# Altium PCB OpenPack_BATMOD_V1p0.PcbDoc (part 2 of 2)
Units mil, origin at the board's own origin, x right, y up, seen from the top; angles counter-clockwise.
Board outline 5511.81 x 3700.79 mil, 4 copper layers (Top Layer, Mid Layer 1, Mid Layer 2, Bottom Layer), stack 61.811 mil thick; 232 components, 137 nets, 760 pads, 470 vias.
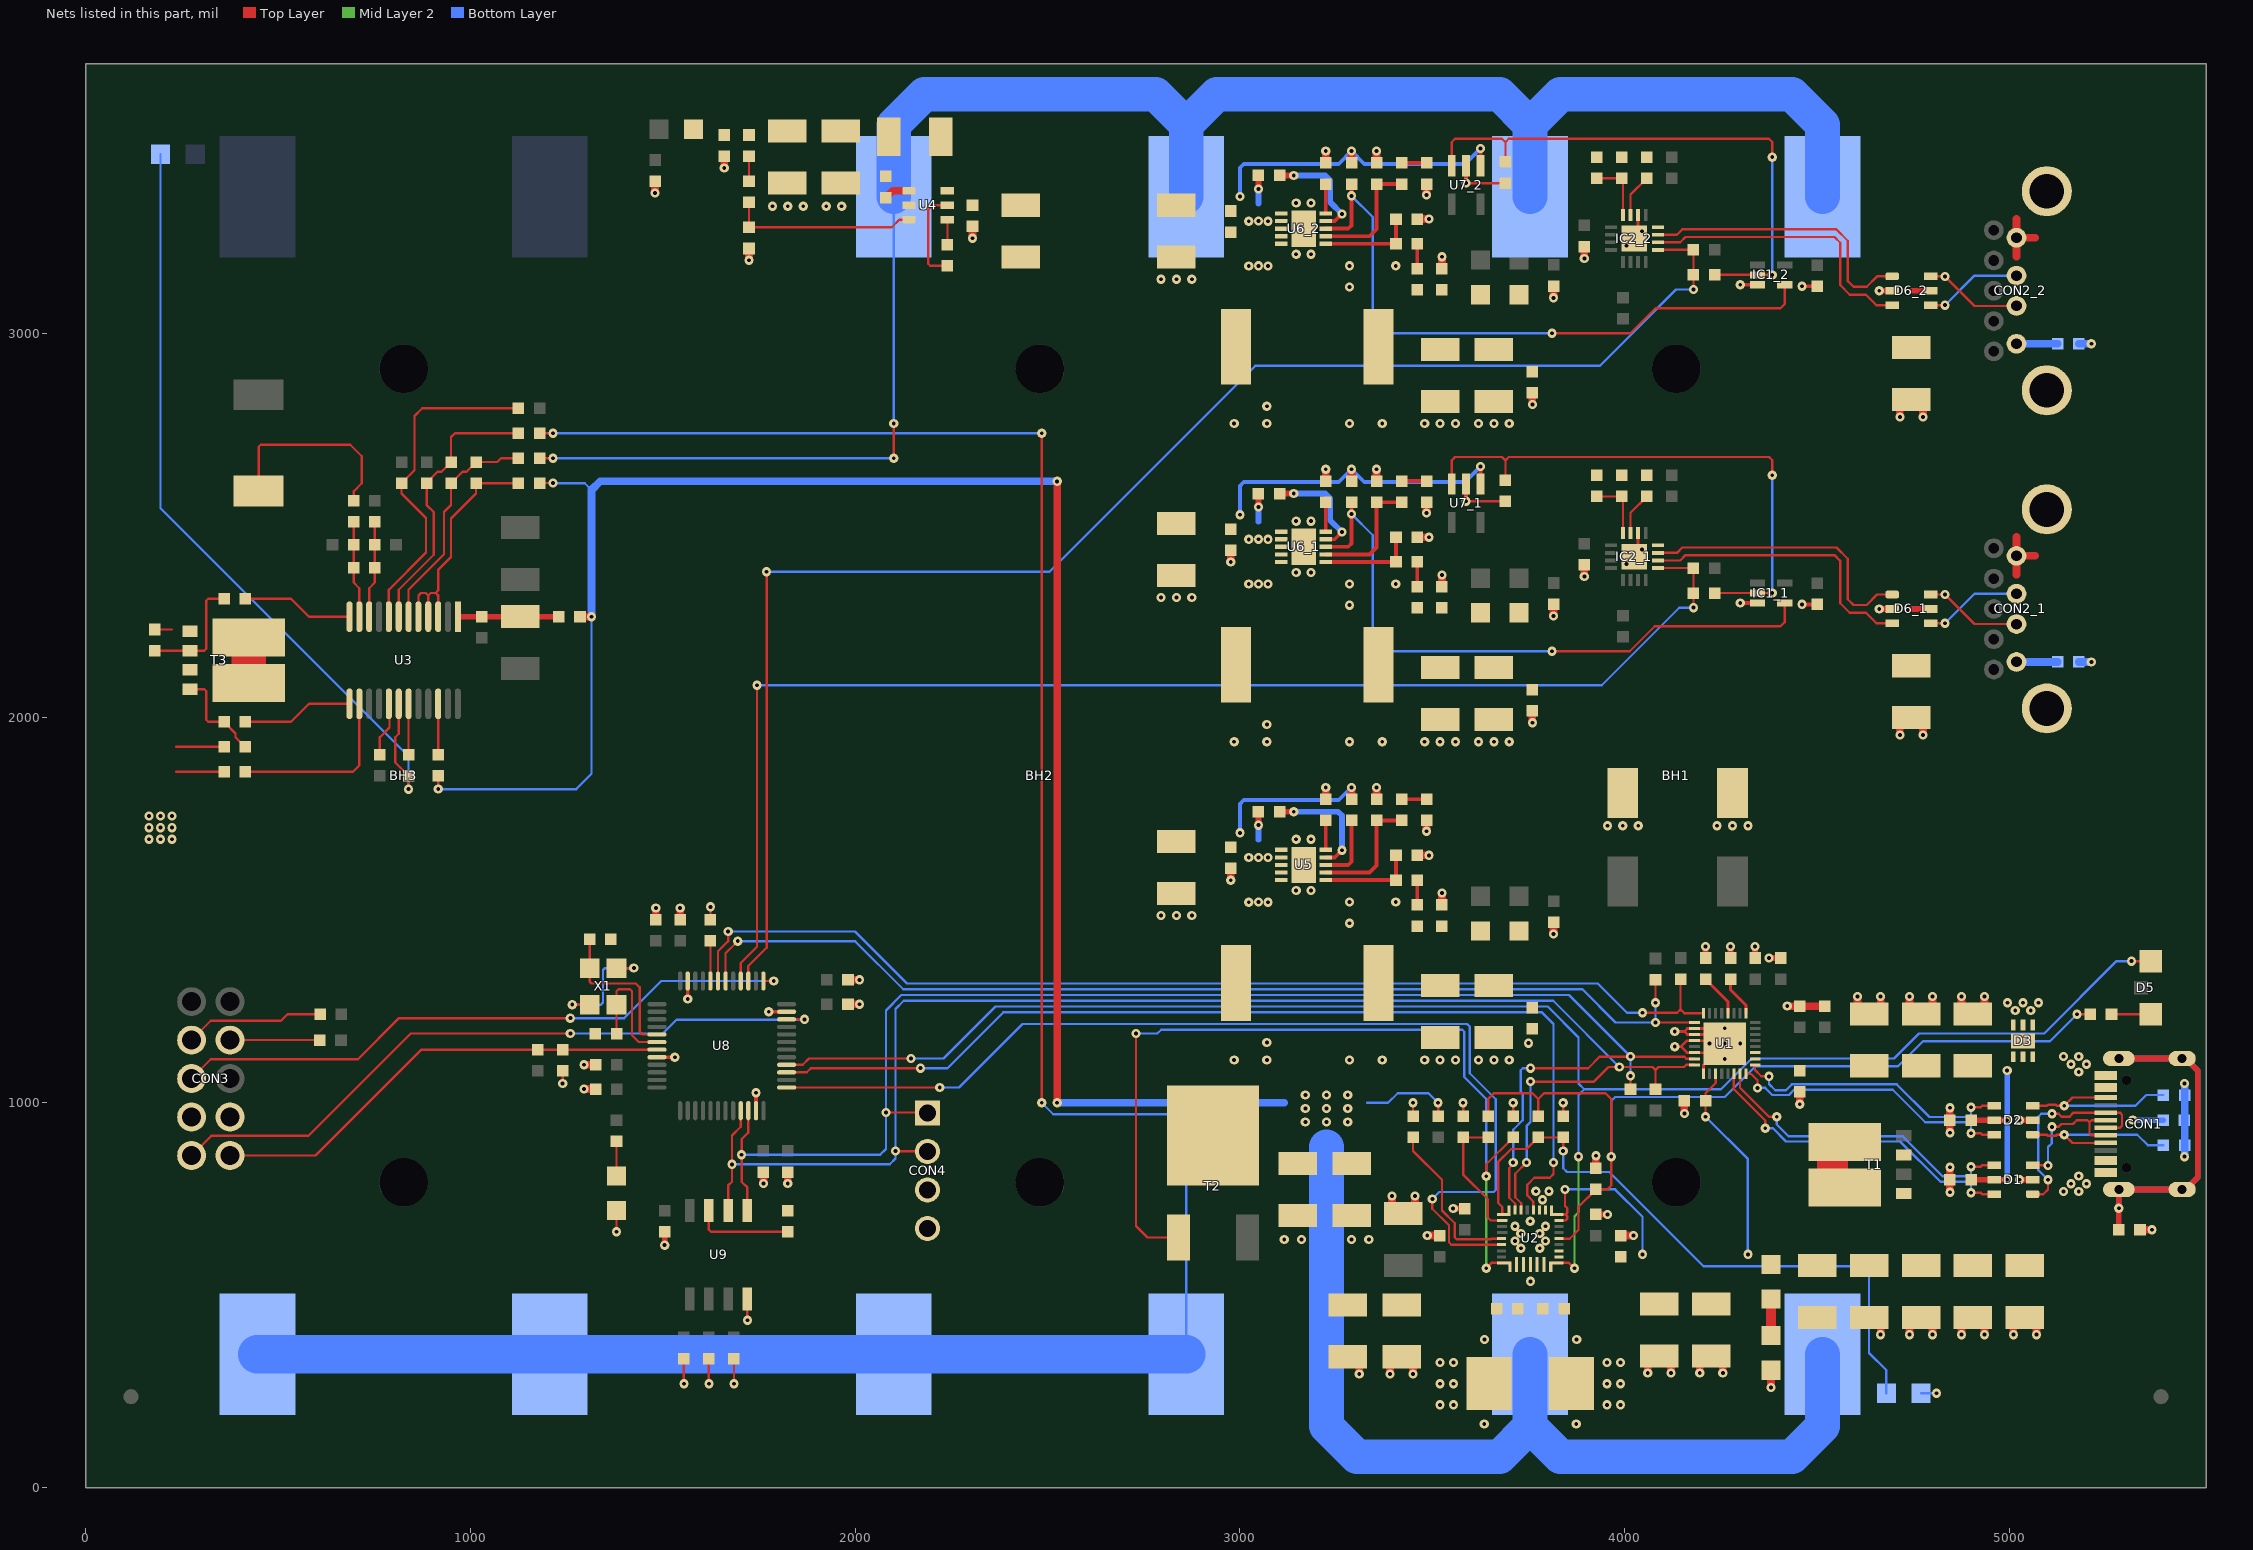
[diagram p4: the nets of this part, all layers, seen from the top]

## Via types
v1: diameter 24, hole 10, Top Layer to Bottom Layer, tented both sides, 470 vias

## Nets (pads, with @x,y where several pads share a name; then routed paths per layer and width w, separated by ;. In a path a pad name is that pad's centre, name@x,y a point inside that pad or via, vN(x,y) a via of type N, cw(c..) or ccw(c..) an arc to the next point about the centre after c; other vN are vias at no path point) (continued)
GND: C1.1 C2.1 C3.1 C4.1 C5.1 C6.1 C7.1 C8.1 C9.1 C10.1 C11.1 C12.1 C13.1 C14.1 C15.1 C16.1 C17.1 C18.1 C19.1 C20.1 C21.1 C22.1 C23.1 C24.1 C25_1.2 C25_2.2 C26.1 C28.1 C29.1 C30.1 C31.1 C33.1 C34.1 C35.1 C47.1 C48.2 C49.1 C50.1 C51.2 C52.2 C54.1 C55.2 C56.1 C57.1 C58.2 C59.2 C60.2 C61.2 C63_1.1 C63_2.1 C64_1.2 C64_2.2 C65_1.1 C65_2.1 C66_1.1 C66_2.1 C67_1.2 C67_2.2 C68_1.2 C68_2.2 C69_1.2 C69_2.2 C70_1.2 C70_2.2 C71_1.2 C71_2.2 C72_1.1 C72_2.1 C73_1.2 C73_2.2 C74.1 C75.1 C76.1 C77.1 C78.1 C79.1 C80.1 C81.1 C82.1 C83.1 C84.1 C85.1 C86.2 C87.1 C88_1.1 C88_2.1 C89.1 C90.2 C91.2 C92.1 CON1.A1/B12 CON1.A12/B1 CON2_1.4 CON2_1.Shell CON2_2.4 CON2_2.Shell CON3.3 CON3.4 CON4.3 CON4.4 D1.2 D2.2 D3.1 D3.2 D3.3 D3.7 D4.2 D6_1.2 D6_2.2 IC1_1.3 IC1_2.3 IC2_1.14 IC2_1.17 IC2_2.14 IC2_2.17 R1.2 R7.2 R10.2 R11.2 R24.1 R25.1 R30.1 R33.1 R35.1 R39_1.1 R39_2.1 R41_1.1 R41_2.1 R43_1.1 R43_2.1 R44_1.1 R44_2.1 R45_1.1 R45_2.1 R46_1.1 R46_2.1 R52.2 R59.1 R60.1 R61.1 R62.1 RT1.1 T3.3 U1.10 U1.11 U1.12 U1.14 U1.17 U1.33 U2.10 U2.11 U2.27 U4.2 U5.3 U5.4 U5.5 U5.EXP U6_1.3 U6_1.4 U6_1.5 U6_1.EXP U6_2.3 U6_2.4 U6_2.5 U6_2.EXP U7_1.2 U7_2.2 U8.8 U8.23 U8.35 U8.47 U9.4 | length 5376.2
  Top Layer w6: 235,1860 R25.1@360,1860 ; 235,1925 R24.1@360,1925 ; v1(1240,1050) C82.1@1240,1083.16 ; v1(1379.94,665) D4.2@1379.94,720 ; v1(1555,270) R60.1@1555,335 ; v1(1620,270) R61.1@1620,335 ; R52.2@1624.02,1476 v1(1624.02,1509.16) ; v1(1685,270) R62.1@1685,335 ; v1(1720,435) U9.4@1720,490 ; R7.2@3450,965 v1(3450,1000) ; R10.2@3580,965 v1(3580,1000) ; v1(3587.61,2563.23) 3687.5,2563.23 R43_1.1@3690,2560.73 ; v1(3587.61,3390) 3687.5,3390 R43_2.1@3690,3387.5 ; C33.1@3710,965 v1(3710,1000) ; R11.2@3840,965 v1(3840,1000) ; IC2_1.17@4034.84,2448.52 v1(4045.16,2438.2) ; IC2_2.17@4034.84,3275.29 v1(4045.16,3264.98)
  Top Layer w7: v1(4130,1185.24) 4154.76,1185.24 ; v1@4132.43,1148.3 v1(4130,1145.87) 4145.87,1145.87 ; U1.17@4204.88,1075 4204.88,1098.62 U1.33@4236.38,1130.12 ; U1.33@4252.13,1130.12 U1.33@4236.38,1130.12 ; U1.33@4252.13,1177.36 U1.11@4181.26,1177.36 4162.64,1177.36 4154.76,1185.24 ; U1.33@4252.13,1193.11 U1.10@4181.26,1193.11 4162.64,1193.11 4154.76,1185.24 ; 4145.87,1145.87 4161.61,1161.61 U1.12@4181.26,1161.61 4252.13,1161.61 v1(4260,1153.74) U1.33@4236.38,1130.12 ; 4145.87,1145.87 4161.61,1130.12 U1.14@4181.26,1130.12 U1.33@4236.38,1130.12
  Top Layer w8: IC2_1.17@4034.84,2448.52 IC2_1.14@4034.84,2480.25 ; IC2_2.17@4034.84,3275.29 IC2_2.14@4034.84,3307.02
  Top Layer w10: U8.8@1485.08,1118.47 v1(1531.5,1118.47) ; v1(1564.96,1270.04) U8.47@1564.96,1316.46 ; U8.23@1742.13,979.54 v1(1742.13,1025.96) ; v1(1775.58,1236.58) U8.35@1822.01,1236.58 ; v1(3587.61,2563.23) U7_1.2@3587.61,2608.23 ; v1(3587.61,3390) U7_2.2@3587.61,3435 ; v1(4300,2299.13) IC1_1.3@4345,2299.13 ; v1(4300,3125.91) IC1_2.3@4345,3125.91 ; v1(4460.87,2295.32) C71_1.2@4500,2295.32 ; v1(4460.87,3122.09) C71_2.2@4500,3122.09
  Top Layer w15: v1(1505,630) C89.1@1505,665 ; C13.1@4210,1376.24 v1(4210,1406.24) ; C14.1@4275,1376.24 v1(4275,1406.24) ; C18.1@4338.74,1376.24 v1(4338.74,1406.24) ; v1(4375,1376.24) C17.1@4405,1376.24 ; v1(4661.54,2283.46) D6_1.2@4695,2283.46 ; v1(4661.54,3110.24) D6_2.2@4695,3110.24 ; v1(5026.21,799.95) D1.2@5060,799.95 ; v1(5026.21,954.52) D2.2@5060,954.52
  Top Layer w20: v1(1295.54,1035.6) C81.1@1325.54,1035.6 ; v1(1295.54,1098.79) C80.1@1325.54,1098.79 ; v1(1480,3364.34) C52.2@1480,3395 ; C79.1@1482.09,1476 v1(1482.09,1506) ; C78.1@1545.28,1476 v1(1545.28,1506) ; v1(1660,3429.34) C51.2@1660,3460 ; v1(1724.23,3189.34) R30.1@1724.23,3220 ; v1(1761.81,790) C74.1@1761.81,820 ; v1(1825,790) C75.1@1825,820 ; C76.1@1981.54,1256.27 v1(2011.54,1256.27) ; C77.1@1981.54,1319.46 v1(2011.54,1319.46) ; v1(2305,3246.84) C48.2@2305,3277.5 ; C64_2.2@2975.5,3262 C64_2.2@2976,3262.5 ; v1(2976,1578.3) C55.2@2976,1608.96 ; v1(2976,2405.07) C64_1.2@2976,2435.73 ; R33.1@3223.16,1788.96 v1(3223.16,1819.61) ; R39_1.1@3223.16,2615.73 v1(3223.16,2646.39) ; R39_2.1@3223.16,3442.5 v1(3223.16,3473.16) ; v1(3310,295) C24.1@3310,327.5 ; C61.2@3355,1788.96 v1(3355,1819.61) ; C70_1.2@3355,2615.73 v1(3355,2646.39) ; C70_2.2@3355,3442.5 v1(3355,3473.16) ; v1(3390,295) C23.1@3390,327.5 ; C92.1@3395,725 v1(3395,757.5) ; v1(3450,295) C23.1@3450,327.5 ; C92.1@3455,725 v1(3455,757.5) ; R35.1@3460.64,1643.08 v1(3491.29,1643.08) ; R41_1.1@3460.64,2469.85 v1(3491.29,2469.85) ; R41_2.1@3460.64,3296.62 v1(3491.29,3296.62) ; v1(3485,1705.8) C60.2@3485,1733.96 C60.2@3485,1736.46 ; v1(3485,2532.57) C69_1.2@3485,2560.73 C69_1.2@3485,2563.23 ; v1(3485,3359.34) C69_2.2@3485,3387.5 C69_2.2@3485,3390 ; v1(3486.63,655) C87.1@3519.13,655 ; C86.2@3525,1514.35 v1(3525,1545.01) ; C25_1.2@3525,2341.12 v1(3525,2371.78) ; C25_2.2@3525,3167.9 v1(3525,3198.55) ; v1(3760,1987.57) C67_1.2@3760,2018.23 ; v1(3760,2814.34) C67_2.2@3760,2845 ; v1(3815,1438.3) C59.2@3815,1468.96 ; v1(3815,2265.07) C68_1.2@3815,2295.73 ; v1(3815,3091.84) C68_2.2@3815,3122.5 ; v1(3895,2367.57) C88_1.1@3895,2398.23 ; v1(3895,3194.34) C88_2.1@3895,3225 ; C31.1@3925,830 v1(3925,862.5) ; C19.1@3990,655 v1(4022.5,655) ; v1(4060,297.5) C29.1@4060,330 ; v1(4120,297.5) C29.1@4120,330 ; v1(4155,972.5) C9.1@4155,1005 ; v1(4195,297.5) C30.1@4195,330 ; v1(4255,297.5) C30.1@4255,330 ; v1(4380,260) C26.1@4380,305 ; v1(4422.5,1251.24) C15.1@4455,1251.24 C16.1@4520,1251.24 ; v1(4455,996.24) C5.1@4455,1028.74 ; C6.1@4605,1243.74 v1(4605,1276.24) ; v1(4665,397.5) C20.1@4665,430 ; C6.1@4665,1243.74 v1(4665,1276.24) ; v1(4715,1955.73) C72_1.1@4715,1988.23 ; v1(4715,2782.5) C72_2.1@4715,2815 ; v1(4740,397.5) C10.1@4740,430 ; C7.1@4740,1243.74 v1(4740,1276.24) ; v1(4775,1955.73) C72_1.1@4775,1988.23 ; v1(4775,2782.5) C72_2.1@4775,2815 ; v1(4800,397.5) C10.1@4800,430 ; C7.1@4800,1243.74 v1(4800,1276.24) ; v1(4845,767.45) C2.1@4845,799.95 v1(4845,832.45) ; v1(4845,922.02) C1.1@4845,954.52 v1(4845,987.02) ; v1(4875,397.5) C11.1@4875,430 ; C8.1@4875,1243.74 v1(4875,1276.24) ; v1(4935,397.5) C11.1@4935,430 ; C8.1@4935,1243.74 v1(4935,1276.24) ; v1(5010,397.5) C12.1@5010,430 ; 5018.11,2372.4 CON2_1.4@5018.11,2421.26 ; 5018.11,2470.12 CON2_1.4@5018.11,2421.26 ; 5018.11,3199.17 CON2_2.4@5018.11,3248.03 ; 5018.11,3296.89 CON2_2.4@5018.11,3248.03 ; 5066.97,2421.26 CON2_1.4@5018.11,2421.26 ; 5066.97,3248.03 CON2_2.4@5018.11,3248.03 ; v1(5070,397.5) C12.1@5070,430 ; R1.2@5339.06,670 v1(5370,670)
  Bottom Layer w6: RT1.1@4770,245 v1(4810,245)
  Bottom Layer w20: C73_1.2@5180,2145.67 v1(5212.56,2145.67) ; C73_2.2@5180,2972.44 v1(5212.56,2972.44) ; v1(5455,860) C4.1@5455,890 C3.1@5455,1020 v1(5455,1050)
  other v1: 3635,165 3874.13,165 3635.87,385 3875,385 3755,536 3115,645 3160,645 3290,645 3335,645 3754.57,692 3786.06,748 3769,770 3803.13,770 5140,769.76 5180,769.76 5160,789.76 5200,789.76 5180,809.76 5180,1080 5160,1100 5200,1100 2985,1111.46 3070,1111.46 3285,1111.46 3370,1111.46 3480,1111.46 3520,1111.46 3560,1111.46 3620,1111.46 3660,1111.46 3700,1111.46 4260,1113.74 5140,1120 5180,1120 4220,1153.74 4300,1153.74 3750,1155 3070,1156.46 4260,1193.74 5015,1240 5055,1240 4995,1260 5035,1260 5075,1260 3285,1466.46 2795,1486.46 2835,1486.46 2875,1486.46 3285,1521.46 3405,1521.46 3146.16,1551.46 3185,1551.46 165,1685 195,1685 225,1685 3146.16,1684.72 3185,1684.72 165,1715 195,1715 225,1715 3955,1720 3995,1720 4035,1720 4240,1720 4280,1720 4320,1720 165,1745 195,1745 225,1745 2985,1938.23 3070,1938.23 3285,1938.23 3370,1938.23 3480,1938.23 3520,1938.23 3560,1938.23 3620,1938.23 3660,1938.23 3700,1938.23 3070,1983.23 3285,2293.23 2795,2313.23 2835,2313.23 2875,2313.23 3285,2348.23 3405,2348.23 3146.16,2378.23 3185,2378.23 4004.84,2400.25 3146.16,2511.49 3185,2511.49 2985,2765 3070,2765 3285,2765 3370,2765 3480,2765 3520,2765 3560,2765 3620,2765 3660,2765 3700,2765 3070,2810 3285,3120 2795,3140 2835,3140 2875,3140 3285,3175 3405,3175 3146.16,3205 3185,3205 4004.84,3227.02 1785,3330 1825,3330 1865,3330 1925,3330 1965,3330 3146.16,3338.26 3185,3338.26
H\C\_1: IC1_1.4 R36_1.1 U6_1.8 | length 1695.1
  Top Layer w6: v1(3810.77,2173.23) 4013.23,2173.23 4078.23,2238.23 4405,2238.23 4415.87,2249.09 IC1_1.4@4415.87,2299.13
  Top Layer w10: U6_1.8@3223.16,2444.86 3281.63,2444.86 3290,2453.23 v1(3290,2530.07) R36_1.1@3290,2560.73
  Bottom Layer w6: v1(3290,2530.07) 3345,2475.07 3345,2198.23 3370,2173.23 v1(3810.77,2173.23)
H\C\_2: IC1_2.4 R36_2.1 U6_2.8 | length 1695.1
  Top Layer w6: v1(3810.77,3000) 4015,3000 4080,3065 4405,3065 4415.87,3075.87 IC1_2.4@4415.87,3125.91
  Top Layer w10: U6_2.8@3223.16,3271.63 3281.63,3271.63 3290,3280 v1(3290,3356.84) R36_2.1@3290,3387.5
  Bottom Layer w6: v1(3290,3356.84) 3345,3301.84 3345,3025 3370,3000 v1(3810.77,3000)
I2C_C_SCL: CON4.2 R2.1 U1.16 U2.14 U8.21 U9.6 | length 3994.9
  Top Layer w6: U9.6@1670,720 1670,785 1680,795 v1(1680,840) 1680,915 1702.76,937.76 U8.21@1702.76,979.54 ; v1(2105,875) 2105.73,874.27 2187.43,874.27 CON4.2@2188.16,873.54 ; U2.14@3730.94,721.73 3730.94,739.06 3715.5,754.5 3715.5,815.5 v1(3745,845) ; v1(3755,1055) 3920,1055 3957.99,1092.99 v1(3985.99,1092.99) 4072.01,1092.99 4080,1085 ; R2.1@4080,1035 4080,1085 ; U1.16@4181.26,1098.62 4159.68,1098.62 4154.05,1092.99 4087.99,1092.99 4080,1085
  Bottom Layer w6: v1(1680,840) 2090,840 2105,855 2105,1243.79 2126.21,1265 3813.98,1265 v1(3985.99,1092.99) ; v1(3745,845) 3745,940 3755,950 v1(3755,1055)
I2C_C_SDA: CON4.1 R3.1 U1.15 U2.15 U8.22 U9.5 | length 4085.7
  Top Layer w6: U9.5@1720,720 1720,780 1705,795 v1(1705,865) 1705,905 1722.44,922.44 U8.22@1722.44,979.54 ; v1(2080,975) 2186.7,975 CON4.1@2188.16,973.54 ; v1(3710,845) 3710,840.88 3699.76,830.64 3699.76,753.24 3715.2,737.8 U2.15@3715.2,721.73 ; v1(3755,1090) 3905,1090 3935,1120 v1(4015,1120) 4154.05,1120 4159.68,1114.37 U1.15@4181.26,1114.37 ; R3.1@4015,1035 v1(4015,1070)
  Bottom Layer w6: v1@1699.35,865 2065,865 2080,880 2080,1240 2120,1280 3855,1280 v1(4015,1120) v1(4015,1070) ; v1(3710,845) 3710,930 3735,955 3735,1024.86 3730,1029.86 3730,1084.73 3735.27,1090 v1(3755,1090)
I2C_T_SCL: R4.1 U1.9 U8.42 | length 2802
  Top Layer w6: U8.42@1663.39,1316.46 1663.39,1388.39 v1(1695,1420) ; v1@4078.78,1209.92 v1@4079.92,1208.78 ; v1(4080,1208.86) U1.9@4181.26,1208.86 ; v1(4080,1260) R4.1@4080,1320
  Bottom Layer w6: v1(1695,1420) 2000,1420 2125,1295 2248,1295 3890,1295 3976.14,1208.86 v1(4080,1208.86) ; v1@4080,1210 v1(4080,1260)
I2C_T_SDA: R5.1 U1.8 U8.43 | length 2848.1
  Top Layer w6: U8.43@1643.7,1316.46 1643.7,1393.7 1670,1420 v1(1670,1445) ; v1(4046,1234) 4136.52,1234 4145,1242.48 ; R5.1@4145,1321.24 4145,1242.48 ; U1.8@4204.88,1232.48 4155,1232.48 4145,1242.48
  Bottom Layer w6: v1(1670,1445) 2000,1445 2135,1310 2248,1310 3930,1310 4006,1234 v1(4046,1234)
I\N\T\: U2.21 U8.25 | length 2743.6
  Top Layer w6: U8.25@1822.01,1039.73 v1(2219.73,1039.73) ; v1(3500,750) 3500,724.73 3543.13,681.59 3543.13,637.32 3549.27,631.18 U2.21@3679.76,631.18
  Bottom Layer w6: v1(2219.73,1039.73) 2269.73,1039.73 2435,1205 2470,1205 3590,1205 3597,1198 3597,1077 3665,1009 3665,773.27 3659.73,768 3518,768 v1(3500,750)
ILIM_HIZ: R8.2 R10.1 U2.17 | length 340.5
  Top Layer w6: R8.2@3645,910 R10.1@3580,910 3580,814 3644,750 3644,702 3651.83,694.17 U2.17@3681.73,694.17
LC_1: IC1_1.2 R42_1.1 R43_1.2 U7_1.3 | length 1457.7
  Top Layer w6: U7_1.3@3550.2,2608.23 3550.2,2669.44 3558.98,2678.23 3681.21,2678.23 3690,2669.44 ; R43_1.2@3690,2615.73 3690,2669.44 ; R42_1.1@4233.5,2324.72 IC1_1.2@4345,2324.72 v1(4383.5,2324.72) ; v1(4383.5,2630.7) 4383.5,2669.72 4375,2678.23 3698.79,2678.23 3690,2669.44
  Bottom Layer w6: v1(4383.5,2324.72) v1(4383.5,2630.7)
LC_2: IC1_2.2 R42_2.1 R43_2.2 U7_2.3 | length 1457.7
  Top Layer w6: U7_2.3@3550.2,3435 3550.2,3496.21 3558.98,3505 3681.21,3505 3690,3496.21 ; R43_2.2@3690,3442.5 3690,3496.21 ; R42_2.1@4233.5,3151.5 IC1_2.2@4345,3151.5 v1(4383.5,3151.5) ; v1(4383.5,3457.48) 4383.5,3496.5 4375,3505 3698.79,3505 3690,3496.21
  Bottom Layer w6: v1(4383.5,3151.5) v1(4383.5,3457.48)
LDO_1V5: C13.2 U1.4 | length 112.7
  Top Layer w8: C13.2@4210,1321.24 4267.87,1263.37 U1.4@4267.87,1232.48
LDO_3V3: C14.2 U1.1 | length 105.4
  Top Layer w8: C14.2@4275,1321.24 4275,1293.74 4315.12,1253.62 U1.1@4315.12,1232.48
NetBH1_1: BH1.1 BH1.3 BH2.2 BH2.4 R17.1 | length 4959.2
  Top Layer w6: R17.1@1180,2675 v1(1215,2675) ; v1(2100.39,2675) v1(2100.39,2765.39)
  Bottom Layer w6: v1(1215,2675) v1(2100.39,2675) ; v1(2100.39,2765.39) BH2.4@2100.39,3354.33
  Bottom Layer w90: BH2.4@2100.39,3354.33 2100.39,3541.71 2179.47,3620.79 2781.16,3620.79 2860.24,3541.71 ; BH2.2@2860.24,3354.33 2860.24,3541.71 ; BH1.1@3753.94,3354.33 3753.94,3541.71 ; BH1.3@4513.78,3354.33 4513.78,3541.71 4434.7,3620.79 3833.02,3620.79 3753.94,3541.71 ; 2860.24,3541.71 2939.32,3620.79 3674.86,3620.79 3753.94,3541.71
NetBH1_2: BH1.2 BH1.4 C34.2 C35.2 R12.1 R13.2 R14.1 R15.1 T2.4 | length 7545.1
  Top Layer w6: v1(916.83,1815.18) R15.1@916.83,1850.18 ; R14.1@1179.82,2610.49 v1(1214.82,2610.49) ; R12.1@3515,965 v1(3515,1000)
  Top Layer w20: R13.2@1285,2263.2 v1(1315,2263.2) ; v1(2525,1000) v1(2525,2615)
  Bottom Layer w6: v1(916.83,1815.18) 1275.18,1815.18 1315,1855 v1(1315,2263.2) ; v1@1214.82,2610 1297.43,2610 1315,2592.43 ; 3330,1000 3385,1000 3410,1025 3490,1025 v1(3515,1000)
  Bottom Layer w20: v1(1315,2263.2) 1315,2592.43 1337.57,2615 v1(2525,2615) ; v1(2525,1000) 3115,1000
  Bottom Layer w90: 3225,885 3225,159.08 3304.08,80 3674.86,80 3753.94,159.08 ; BH1.2@3753.94,346.46 3753.94,159.08 ; BH1.4@4513.78,346.46 4513.78,159.08 4434.7,80 3833.02,80 3753.94,159.08
  other v1: 3170,950 3225,950 3280,950 3170,985 3225,985 3280,985 3170,1020 3225,1020 3280,1020
NetBH2_1: BH2.1 BH2.3 BH3.2 BH3.4 R19.1 | length 6463.6
  Top Layer w6: R19.1@1180,2740 v1(1215,2740) ; v1(2485,1000) v1(2485,2740)
  Bottom Layer w6: v1(1215,2740) v1(2485,2740) ; v1(2485,1000) 2515,970 2850,970 2860.24,959.76 BH2.1@2860.24,346.46
  Bottom Layer w100: BH3.2@446.85,346.46 BH3.4@1206.69,346.46 BH2.3@2100.39,346.46 BH2.1@2860.24,346.46
NetC3_2: C3.2 CON1.B5 D2.3 | length 470.2
  Top Layer w6: D2.3@5060,991.93 5096.93,991.93 5100,995 5120.39,995 5123.07,992.32 v1(5142.32,992.32) 5163.78,1013.78 CON1.B5@5249.8,1013.78
  Bottom Layer w6: v1(5142.32,992.32) 5327.32,992.32 5355,1020 C3.2@5400,1020
NetC4_2: C4.2 CON1.A5 D2.1 | length 470
  Top Layer w6: D2.1@5060,917.13 5096.93,917.13 5100,914.06 5120.39,914.06 5123.07,916.73 v1@5142.32,916.73 ; v1(5142.32,917.13) 5163.78,895.67 CON1.A5@5249.8,895.67
  Bottom Layer w6: v1(5142.32,917.13) 5332.13,917.13 5359.25,890 C4.2@5400,890
NetC26_2: C26.2 R6.1 | length 95
  Top Layer w25: C26.2@4380,395 R6.1@4380,490
NetC38_1: C38.1 C45.2 R58.2 U3.11 | length 252.9
  Top Layer w6: R58.2@696.91,2510 C45.2@696.91,2450 C38.1@696.91,2390 696.91,2351.91 711.61,2337.2 U3.11@711.61,2263.2
NetC38_2: C38.2 C44.2 R57.2 U3.10 | length 252.9
  Top Layer w6: U3.10@737.2,2263.2 737.2,2337.2 751.91,2351.91 C38.2@751.91,2390 C44.2@751.91,2450 R57.2@751.91,2510
NetC46_1: C46.1 L2.1 U4.6
NetC46_2: C46.2 U4.1 | length 67.2
  Top Layer w20: C46.2@2080,3352.5 2097.39,3369.89 U4.1@2140,3369.89
NetC49_2: C49.2 C50.2 C51.1 L2.2 L3.1 R28.2
NetC53_1: C53.1 L5.1 U5.2 | length 73
  Top Layer w15: v1(3048,1721.46) C53.1@3048,1756.46
  Bottom Layer w15: 3048,1683.46 v1(3048,1721.46)
  other v1: 3023,1521.14 3048,1521.46 3073,1521.14 3023,1637.46 3073,1637.46 3048,1637.77
NetC53_2: C53.2 U5.9 | length 305.7
  Top Layer w10: U5.9@3223.16,1637.77 3246.32,1637.77 v1(3265,1656.46)
  Top Layer w15: C53.2@3103,1756.46 v1(3140,1756.46)
  Bottom Layer w15: v1(3140,1756.46) 3255,1756.46 3265,1746.46 v1(3265,1656.46)
NetC60_1: C60.1 R34.1 | length 65
  Top Layer w10: R34.1@3420,1788.96 C60.1@3485,1788.96
NetC61_1: C61.1 R34.2 U5.7 | length 321.8
  Top Layer w10: U5.7@3223.16,1598.4 3336.94,1598.4 3355,1616.46 C61.1@3355,1733.96 R34.2@3420,1733.96
NetC62_1_1: C62_1.1 L7_1.1 U6_1.2 | length 73
  Top Layer w15: v1(3048,2548.23) C62_1.1@3048,2583.23
  Bottom Layer w15: 3048,2510.23 v1(3048,2548.23)
  other v1: 3023,2347.91 3048,2348.23 3073,2347.91 3023,2464.23 3073,2464.23 3048,2464.54
NetC62_1_2: C62_1.2 U6_1.9 | length 286.3
  Top Layer w10: U6_1.9@3223.16,2464.54 3246.32,2464.54 v1(3265,2483.23)
  Top Layer w15: C62_1.2@3103,2583.23 v1(3140,2583.23)
  Bottom Layer w15: v1(3140,2583.23) 3221.82,2583.23 3235,2570.05 3235,2513.23 v1(3265,2483.23)
NetC62_2_1: C62_2.1 L7_2.1 U6_2.2 | length 73
  Top Layer w15: v1(3048,3375) C62_2.1@3048,3410
  Bottom Layer w15: 3048,3337 v1(3048,3375)
  other v1: 3023,3174.69 3048,3175 3073,3174.69 3023,3291 3048,3291.31 3073,3291
NetC62_2_2: C62_2.2 U6_2.9 | length 286.3
  Top Layer w10: U6_2.9@3223.16,3291.32 3246.32,3291.32 v1(3265,3310)
  Top Layer w15: C62_2.2@3103,3410 v1(3140,3410)
  Bottom Layer w15: v1(3140,3410) 3221.82,3410 3235,3396.82 3235,3340 v1(3265,3310)
NetC69_1_1: C69_1.1 R40_1.1 | length 65
  Top Layer w10: R40_1.1@3420,2615.73 C69_1.1@3485,2615.73
NetC69_2_1: C69_2.1 R40_2.1 | length 65
  Top Layer w10: R40_2.1@3420,3442.5 C69_2.1@3485,3442.5
NetC70_1_1: C70_1.1 R40_1.2 U6_1.7 | length 321.8
  Top Layer w10: U6_1.7@3223.16,2425.17 3336.94,2425.17 3355,2443.23 C70_1.1@3355,2560.73 R40_1.2@3420,2560.73
NetC70_2_1: C70_2.1 R40_2.2 U6_2.7 | length 321.8
  Top Layer w10: U6_2.7@3223.16,3251.94 3336.94,3251.94 3355,3270 C70_2.1@3355,3387.5 R40_2.2@3420,3387.5
NetC83_2: C83.2 U8.5 X1.1 | length 409.1
  Top Layer w6: C83.2@1310,1425 X1.1@1310,1350 1310,1315.27 1315.27,1310 1430,1310 1440,1300 1440,1185.27 1447.74,1177.53 U8.5@1485.08,1177.53
NetC84_2: C84.2 U8.6 X1.3 | length 340.8
  Top Layer w6: C84.2@1380,1180 X1.3@1380,1255 1380,1289.73 1385.27,1295 1414.73,1295 1420,1289.73 1420,1175.27 1437.43,1157.84 U8.6@1485.08,1157.84
NetCON1_A6: CON1.A6 CON1.B6 D1.1 | length 547.6
  Top Layer w6: D1.1@5060,762.56 5087.56,762.56 5100,775 v1(5100,799.95) ; v1(5110,971.52) 5127.48,971.52 5135.08,963.92 5156.08,963.92 5166.57,974.41 CON1.B6@5249.8,974.41 5286.73,974.41 5292,969.14 5292,940.31 5286.73,935.04 CON1.A6@5249.8,935.04
  Bottom Layer w6: v1(5100,799.95) 5075,824.95 5075,964 5082.52,971.52 v1(5110,971.52)
NetCON1_A7: CON1.A7 CON1.B7 D1.3 | length 368.8
  Top Layer w6: D1.3@5060,837.36 v1(5100,837.36) ; v1(5110,937.52) 5127.48,937.52 5135.08,945.12 5165.12,945.12 5174.72,954.72 5202.33,954.72 5207.61,949.45 ; CON1.B7@5249.8,915.35 5212.88,915.35 5207.61,920.63 5207.61,949.45 ; CON1.A7@5249.8,954.72 5212.88,954.72 5207.61,949.45
  Bottom Layer w6: v1(5100,837.36) 5100,885 5110,895 v1(5110,937.52)
NetCON1_Shell: CON1.Shell R1.1 | length 1562.1
  Top Layer w15: R1.1@5284.06,670 v1(5284.06,725.94) CON1.Shell@5284.06,774.8 CON1.Shell@5448.62,774.8 ; CON1.Shell@5284.06,1114.96 CON1.Shell@5448.62,1114.96 5457.78,1114.96 5488.87,1083.87 5488.87,805.9 CON1.Shell@5457.78,774.8
  Bottom Layer w15: v1(5284.06,725.94) CON1.Shell@5284.06,774.8 CON1.Shell@5448.62,774.8 ; CON1.Shell@5284.06,1114.96 CON1.Shell@5448.62,1114.96 5457.78,1114.96 5488.87,1083.87 5488.87,805.9 CON1.Shell@5457.78,774.8
NetCON3_7: CON3.7 R50.2 | length 233.4
  Top Layer w6: CON3.7@375.59,1162.99 R50.2@609,1162.99
NetCON3_8: CON3.8 R51.1 | length 362.2
  Top Layer w6: CON3.8@275.59,1162.99 325.6,1213 508,1213 525,1230 R51.1@610,1230
NetD4_1: D4.1 R54.2 | length 90
  Top Layer w6: D4.1@1379.94,810 R54.2@1379.94,900
NetD5_A: D5.A R55.2 | length 102.3
  Top Layer w6: R55.2@5265,1230 5366.81,1230 D5.A@5367.13,1230.31
NetIC2_1_15: IC2_1.15 R46_1.2 | length 113
  Top Layer w6: IC2_1.15@4015.16,2480.25 4015.16,2533.36 R46_1.2@4057.5,2575.7
NetIC2_1_16: IC2_1.16 R44_1.2 R45_1.2 | length 161.7
  Top Layer w6: R44_1.2@3927.5,2575.7 R45_1.2@3992.5,2575.7 3995.47,2572.73 IC2_1.16@3995.47,2480.25
NetIC2_2_15: IC2_2.15 R46_2.2 | length 113
  Top Layer w6: IC2_2.15@4015.16,3307.02 4015.16,3360.13 R46_2.2@4057.5,3402.48
NetIC2_2_16: IC2_2.16 R44_2.2 R45_2.2 | length 161.7
  Top Layer w6: R44_2.2@3927.5,3402.48 R45_2.2@3992.5,3402.48 3995.47,3399.5 IC2_2.16@3995.47,3307.02
NetR15_2: R15.2 U3.22 | length 131.8
  Top Layer w6: R15.2@916.34,1905 U3.22@916.34,2036.8
NetR16_1: R16.1 RT2.2 U3.18 | length 2156.8
  Top Layer w6: U3.18@813.98,2036.8 813.98,1958.98 805,1950 805,1884.57 R16.1@839.57,1850 v1(839.57,1815)
  Bottom Layer w6: RT2.2@195,3465 195,2545 839.57,1900.43 v1(839.57,1815)
NetR16_2: R16.2 U3.19 | length 131.8
  Top Layer w6: R16.2@839.57,1905 U3.19@839.57,2036.8
NetR18_2: R18.2 U3.17 | length 155.4
  Top Layer w6: R18.2@765,1905 765,1950 790,1975 U3.17@790,2050
NetR21_1: R21.1 R23.2 T3.2 | length 308.8
  Top Layer w6: R23.2@180,2175 T3.2@271.17,2175 308.73,2175 314,2180.27 314,2304.73 319.27,2310 R21.1@360,2310
NetR21_2: R21.2 U3.12 | length 290.4
  Top Layer w6: R21.2@415,2310 534,2310 580.8,2263.2 U3.12@686.02,2263.2
NetR22_1: R22.1 R24.2 T3.4 | length 255.4
  Top Layer w6: T3.4@271.17,2075 308.73,2075 314,2069.73 314,1995.27 319.27,1990 R22.1@360,1990 390,1960 390,1950 R24.2@415,1925
NetR22_2: R22.2 U3.13 | length 290.4
  Top Layer w6: R22.2@415,1990 534,1990 580.8,2036.8 U3.13@686.02,2036.8
NetR23_1: R23.1 R26.2 R58.1 T3.1 | length 566.1
  Top Layer w6: R23.1@180,2230 225,2230 ; R26.2@450,2590 450,2704.73 455.27,2710 688.03,2710 718,2680.03 718,2610 696.91,2588.91 R58.1@696.91,2565
NetR25_2: R25.2 U3.14 | length 463.7
  Top Layer w6: R25.2@415,1860 695,1860 711.61,1876.61 U3.14@711.61,2036.8
NetR27_1: R27.1 U4.4 | length 65.1
  Top Layer w6: R27.1@2240,3230 U4.4@2240,3295.09
NetR28_1: R28.1 R29.2 | length 65
  Top Layer w6: R29.2@1724.23,3395 R28.1@1724.23,3460
NetR31_1: R31.1 R32.2 | length 64.4
  Top Layer w10: R31.1@3460.64,1514.35 R32.2@3460.64,1578.72
NetR33_2: R33.2 U5.10 | length 76.5
  Top Layer w10: U5.10@3223.16,1657.46 R33.2@3223.16,1733.96
NetR37_1_1: R37_1.1 R38_1.2 | length 64.4
  Top Layer w10: R37_1.1@3460.64,2341.12 R38_1.2@3460.64,2405.49
NetR37_2_1: R37_2.1 R38_2.2 | length 64.4
  Top Layer w10: R37_2.1@3460.64,3167.9 R38_2.2@3460.64,3232.26
NetR39_1_2: R39_1.2 U6_1.10 | length 76.5
  Top Layer w10: U6_1.10@3223.16,2484.23 R39_1.2@3223.16,2560.73
NetR39_2_2: R39_2.2 U6_2.10 | length 76.5
  Top Layer w10: U6_2.10@3223.16,3311 R39_2.2@3223.16,3387.5
NetR52_1: R52.1 U8.44 | length 104.5
  Top Layer w6: U8.44@1624.02,1316.46 R52.1@1624.02,1421
NetR56_1: R56.1 U5.8 | length 177.8
  Top Layer w10: U5.8@3223.16,1618.09 3281.63,1618.09 3290,1626.46 R56.1@3290,1733.96
NetT1_9: T1.9 T1.10 | length 118.1
  Top Layer w80: T1.9@4540,786.26 T1.10@4540,904.37
NetT3_9: T3.9 T3.10 | length 118.1
  Top Layer w90: T3.10@424.52,2090.94 T3.9@424.52,2209.06
NetX1_2: X1.2 X1.4 | length 338.8
  Top Layer w6: v1(1265,1255) X1.2@1310,1255 ; X1.4@1380,1350 v1(1425,1350)
  Bottom Layer w6: v1(1265,1255) 1339.73,1255 1345,1260.27 1345,1344.73 1350.27,1350 v1(1425,1350)
PMID: C28.2 C29.2 C30.2 U2.29
PROG: R7.1 U2.20 | length 429.2
  Top Layer w6: R7.1@3450,910 3450,875 3525,800 3525,720 3558,687 3558,650.27 3563.27,645 3651,645 3652.93,646.93 U2.20@3679.76,646.93
Q\O\N\: U2.12 U8.27 | length 2611.3
  Top Layer w6: U8.27@1822.01,1079.1 1874.1,1079.1 1885,1090 v1(2170,1090) ; U2.12@3762.44,721.73 3762.44,743.56 3747,759 3747,787 3765,805 3805,805 3815,815 v1(3815,845)
  Bottom Layer w6: v1(2170,1090) 2240,1090 2385,1235 2420,1235 3785,1235 3815,1205 v1(3815,845)
REGN: C31.2 R8.1 R9.1 R55.1 U2.5 | length 2370.9
  Top Layer w6: R8.1@3645,965 3645,1010 3660,1025 3760,1025 3775,1010 ; R9.1@3775,965 3775,1010 ; U2.5@3829.37,646.93 3856.93,646.93 3880,670 3880,730 C31.2@3925,775 3955,775 3965,785 v1(3965,860) 3965,1010 3950,1025 3790,1025 3775,1010 ; v1(5175,1230) R55.1@5210,1230
  Bottom Layer w6: v1(3965,860) 3965,1004.73 3975.27,1015 4260,1015 4340,1095 4710,1095 4775,1160 5105,1160 v1(5175,1230)
RST: C82.2 CON3.1 R53.1 U8.7 | length 1223.5
  Top Layer w6: CON3.1@375.59,862.99 597.99,862.99 873.16,1138.16 R53.1@1175,1138.16 C82.2@1240,1138.16 U8.7@1485.08,1138.16
S\T\A\T\_1: IC2_1.9 R42_1.2 R47_1.1 U8.40 | length 3498.5
  Top Layer w6: U8.40@1702.76,1316.46 1702.76,1363.43 1745,1405.68 v1(1745,2085) ; IC2_1.9@4086.02,2389.7 R47_1.1@4178.5,2389.7 R42_1.2@4178.5,2324.72 v1(4178.5,2286.75)
  Bottom Layer w6: v1(1745,2085) 1765,2085 3940,2085 4141.75,2286.75 v1(4178.5,2286.75)
S\T\A\T\_2: IC2_2.9 R42_2.2 R47_2.1 U8.39 | length 3991
  Top Layer w6: U8.39@1722.44,1316.46 1722.44,1355.28 1770,1402.84 v1(1770,2380) ; IC2_2.9@4086.02,3216.47 R47_2.1@4178.5,3216.47 R42_2.2@4178.5,3151.5 v1(4178.5,3113.52)
  Bottom Layer w6: v1(1770,2380) 2505,2380 3040,2915 3935,2915 4133.52,3113.52 v1(4178.5,3113.52)
SDRV: C33.2 T2.1 U2.24 | length 2326.6
  Top Layer w6: v1(2730,1180) 2730,680 2760,650 T2.1@2840,650 ; v1(3640,570) 3653.94,583.94 U2.24@3682.72,583.94 3700.48,583.94 3701.42,583 U2.24@3701.42,574.09 ; v1(3640,809) 3640,840 C33.2@3710,910
  Mid Layer 2 w6: v1(3640,570) v1(3640,809)
  Bottom Layer w6: v1(2730,1180) 2785.27,1180 2795.27,1190 3577.73,1190 3583,1184.73 3583,1067 3640,1010 v1(3640,809)
STAT: D5.K U2.1 U8.28 | length 4457.3
  Top Layer w6: U8.28@1822.01,1098.79 1863.79,1098.79 1880,1115 v1(2145,1115) ; U2.1@3807.72,574.09 3807.72,582.06 3808.65,583 3808.65,583.94 U2.1@3826.42,583.94 3855.2,583.94 v1(3869.13,570) ; v1(5316.89,1368.11) D5.K@5367.13,1368.11
  Mid Layer 2 w6: v1(3869.13,570) 3869.57,570.43 3869.57,704.57 3880,715 v1(3880,860)
  Bottom Layer w6: v1(2145,1115) 2230,1115 2365,1250 2380,1250 3800,1250 3880,1170 3880,1050 3895,1035 ; v1(3880,860) 3880,1020 3895,1035 ; v1(5316.89,1368.11) 5278.11,1368.11 5090,1180 4765,1180 4700,1115 4330,1115 4250,1035 3895,1035
SW1: C27.1 L1.1 U2.28 | length 30
  Top Layer w15: C27.1@3925,710 v1(3955,710)
  other v1: 3954.13,215 3989.13,215 3954.13,270 3989.13,270 3954.13,325 3989.13,325 3779.13,622 3794.13,641 3779.13,660 3794.13,679
SW2: C32.2 L1.2 U2.26 | length 30
  Top Layer w15: v1(3554.13,725) C32.2@3584.13,725
  other v1: 3520,215 3555,215 3520,270 3555,270 3520,325 3555,325 3730,622 3715,641 3730,660 3715,679
SWCLK: CON3.6 U8.37 | length 1644.7
  Top Layer w6: CON3.6@275.59,1062.99 325.6,1113 708,1113 815,1220 v1(1260,1220) ; U8.37@1761.81,1316.46 v1(1788.54,1316.46)
  Bottom Layer w6: v1(1260,1220) 1400,1220 1496.46,1316.46 v1(1788.54,1316.46)
SWDIO: CON3.2 U8.34 | length 1785.9
  Top Layer w6: CON3.2@275.59,862.99 326.6,914 579,914 845,1180 v1(1260,1180) ; U8.34@1822.01,1216.9 v1(1868.43,1216.9)
  Bottom Layer w6: v1(1260,1180) 1500,1180 1535.58,1215.58 1867.12,1215.58 v1(1868.43,1216.9)
TS: R9.2 R11.1 RT1.2 U2.16 | length 1680.7
  Top Layer w6: U2.16@3681.61,709.92 3681.61,729.39 3671,740 3671,846 3705,880 3745,880 R9.2@3775,910 R11.1@3840,910 v1(3840,875) ; U2.16@3698.51,709.92 3699.45,710.86 U2.16@3699.45,719.76
  Top Layer w8: U2.16@3681.61,709.92 U2.16@3698.51,709.92
  Bottom Layer w6: v1(3840,875) 3840,830 3850,820 3960,820 4205,575 4615,575 4635,555 4635,350 4680,305 RT1.2@4680,245
USB_CC1: D2.6 U1.24 | length 746.2
  Top Layer w6: U1.24@4315.12,1075 4328.74,1075 4345,1058.74 v1(4345,1038.74) ; v1(4900,920.75) 4925,920.75 4928.62,917.13 D2.6@4960,917.13
  Bottom Layer w6: v1(4345,1038.74) 4365,1038.74 4383.26,1020.48 4426.74,1020.48 4440,1033.74 4696.29,1033.74 4780.86,949.17 4894.14,949.17 4900,943.31 v1(4900,920.75)
USB_CC2: D2.4 U1.25 | length 732.9
  Top Layer w6: U1.25@4338.74,1098.62 4338.74,1085 4355,1068.74 v1(4375,1068.74) ; v1(4900,988.31) 4925,988.31 4928.62,991.93 D2.4@4960,991.93
  Bottom Layer w6: v1(4375,1068.74) 4375,1048.74 4391.26,1032.48 4418.74,1032.48 4434.14,1047.88 4707.12,1047.88 4791.69,963.31 4894.27,963.31 4900,969.04 v1(4900,988.31)
USB_DM_1: CON2_1.2 D6_1.6 | length 254.9
  Top Layer w6: D6_1.6@4795,2320.86 v1(4832.37,2320.86) 4909.15,2244.08 CON2_1.2@5018.11,2244.09
USB_DM_2: CON2_2.2 D6_2.6 | length 254.9
  Top Layer w6: D6_2.6@4795,3147.63 v1(4832.37,3147.63) 4909.15,3070.85 CON2_2.2@5018.11,3070.87
USB_DM_S_1: D6_1.1 IC2_1.11 | length 749.3
  Top Layer w6: IC2_1.11@4086.02,2429.07 4135.84,2429.07 4149.69,2442.91 4550.31,2442.91 4579.69,2413.54 4579.69,2308.54 4594.54,2293.68 4628.71,2293.68 4655.88,2320.86 D6_1.1@4695,2320.86
USB_DM_S_2: D6_2.1 IC2_2.11 | length 749.3
  Top Layer w6: IC2_2.11@4086.02,3255.84 4135.84,3255.84 4149.69,3269.69 4550.31,3269.69 4579.69,3240.32 4579.69,3135.31 4594.54,3120.46 4628.71,3120.46 4655.88,3147.63 D6_2.1@4695,3147.63
USB_DN: D1.4 U1.23 | length 826.7
  Top Layer w6: U1.23@4299.37,1075 4299.37,1039.37 4374.99,963.75 v1(4394.99,963.75) ; v1(4900,833.74) 4925,833.74 4928.62,837.36 D1.4@4960,837.36
  Bottom Layer w6: v1(4394.99,963.75) 4394.99,943.75 4425.86,912.88 4722.12,912.88 4826.26,808.74 4894.27,808.74 4900,814.47 v1(4900,833.74)
USB_DP: D1.6 U1.22 | length 854.1
  Top Layer w6: U1.22@4283.62,1075 4283.62,1035.12 4364.99,953.75 v1(4364.99,933.75) ; v1(4900,766.18) 4925,766.18 4928.62,762.56 D1.6@4960,762.56
  Bottom Layer w6: v1(4364.99,933.75) 4384.99,933.75 4419.37,899.37 4715.63,899.37 4820.4,794.6 4894.14,794.6 4900,788.74 v1(4900,766.18)
USB_DP_1: CON2_1.3 D6_1.4 | length 254.9
  Top Layer w6: D6_1.4@4795,2246.06 v1(4832.37,2246.06)
  Bottom Layer w6: v1(4832.37,2246.06) 4909.15,2322.83 CON2_1.3@5018.11,2322.83
USB_DP_2: CON2_2.3 D6_2.4 | length 254.9
  Top Layer w6: D6_2.4@4795,3072.83 v1(4832.37,3072.83)
  Bottom Layer w6: v1(4832.37,3072.83) 4909.15,3149.61 CON2_2.3@5018.11,3149.61
USB_DP_S_1: D6_1.3 IC2_1.10 | length 752.5
  Top Layer w6: IC2_1.10@4086.02,2409.39 4144,2409.39 4157.84,2423.23 4545,2423.23 4560,2408.23 4560,2298.23 4585,2273.23 4626.77,2273.23 4653.94,2246.06 D6_1.3@4695,2246.06
USB_DP_S_2: D6_2.3 IC2_2.10 | length 752.5
  Top Layer w6: IC2_2.10@4086.02,3236.16 4144,3236.16 4157.84,3250 4545,3250 4560,3235 4560,3125 4585,3100 4626.77,3100 4653.94,3072.83 D6_2.3@4695,3072.83
VBUS_1: C72_1.2 C73_1.1 CON2_1.1 D6_1.5 IC2_1.12 | length 155.1
  Top Layer w15: 4746.76,2283.46 D6_1.5@4795,2283.46
  Bottom Layer w20: CON2_1.1@5018.11,2145.67 C73_1.1@5125,2145.67
VBUS_2: C72_2.2 C73_2.1 CON2_2.1 D6_2.5 IC2_2.12 | length 155.1
  Top Layer w15: 4746.76,3110.24 D6_2.5@4795,3110.24
  Bottom Layer w20: CON2_2.1@5018.11,2972.44 C73_2.1@5125,2972.44
VC0: C40.1 R20.2 U3.8 | length 880.4
  Top Layer w6: U3.8@788.39,2263.2 788.39,2333.39 885,2430 885,2520 821.4,2583.6 C40.1@821.4,2610 855,2643.6 855,2785 875,2805 R20.2@1125,2805
VC1: C37.1 C39.2 R19.2 U3.7 | length 724.1
  Top Layer w6: U3.7@813.98,2263.2 813.98,2333.39 905,2424.41 905,2535 886.4,2553.6 C39.2@886.4,2610 ; C39.2@885,2610 915,2640 925,2640 C37.1@950,2665 950,2730 960,2740 R19.2@1125,2740
VC2: C36.1 C37.2 R17.2 U3.6 | length 594.5
  Top Layer w6: U3.6@839.57,2263.2 839.57,2333.39 931.4,2425.22 931.4,2535 950,2553.6 C37.2@950,2610 980,2640 990,2640 C36.1@1015,2665 1070,2665 1080,2675 R17.2@1125,2675
VC3: C36.2 R14.2 U3.3 U3.4 U3.5 | length 666.5
  Top Layer w6: U3.5@865.16,2263.2 865.16,2318.66 871.5,2325 884.41,2325 890.75,2318.66 ; U3.4@890.75,2263.2 890.75,2318.66 ; U3.3@916.34,2263.2 916.34,2318.66 910,2325 ; R14.2@1125,2610 C36.2@1015,2610 1015,2583.6 950,2518.6 950,2418.23 916.34,2384.57 916.34,2331.34 910,2325 ; 890.75,2318.66 897.09,2325 910,2325
VDD: C41.2 C42.2 R13.1 U3.1 | length 262.5
  Top Layer w15: U3.1@967.52,2263.2 C41.2@1030,2263.2 C42.2@1130,2263.2 R13.1@1230,2263.2
VI/O: C9.2 C10.2 C11.2 C12.2 C19.2 C20.2 C21.2 R6.2 T1.1 U1.19 U2.2 U2.3 U2.8 U2.9 | length 1003.3
  Top Layer w6: U2.9@3809.68,719.76 3810,719.45 3810,710.54 3810.62,709.92 U2.9@3827.4,709.92 ; U2.8@3829.37,694.17 3845.73,694.17 3851,699.45 3851,704.65 3845.73,709.92 ; U2.9@3829.37,709.92 3845.73,709.92 ; v1(3845,775) 3845,732 3851,726 3851,715.19 3845.73,709.92 ; v1(4210,963.74) C9.2@4210,1005 4210,1025 4236.38,1051.38 U1.19@4236.38,1075
  Bottom Layer w6: v1(3845,775) 3975,775 4046,704 v1(4046,606.12) ; v1(4210,963.74) 4320,853.74 v1(4320,606.12)
VOUT: C56.2 C57.2 C58.1 C86.1 L4.1 L5.2 L6.1 R31.2
VOUT_1: C25_1.1 C65_1.2 C66_1.2 C67_1.1 L7_1.2 L8_1.1 L9_1.1 R37_1.2
VOUT_2: C25_2.1 C65_2.2 C66_2.2 C67_2.1 L7_2.2 L8_2.1 L9_2.1 R37_2.2
VSENSE: R32.1 R35.2 U5.6 | length 246.8
  Top Layer w10: U5.6@3223.16,1578.72 R32.1@3405.64,1578.72 R35.2@3405.64,1643.08
VSENSE3V3: R29.1 R30.2 U4.3 | length 489.1
  Top Layer w6: R29.1@1724.23,3340 R30.2@1724.23,3275 2095,3275 2115.09,3295.09 U4.3@2140,3295.09
VSENSE_1: R38_1.1 R41_1.2 U6_1.6 | length 246.8
  Top Layer w10: U6_1.6@3223.16,2405.49 R38_1.1@3405.64,2405.49 R41_1.2@3405.64,2469.85
VSENSE_2: R38_2.1 R41_2.2 U6_2.6 | length 246.8
  Top Layer w10: U6_2.6@3223.16,3232.26 R38_2.1@3405.64,3232.26 R41_2.2@3405.64,3296.62
VSYS: C22.2 C23.2 C24.2 C47.2 C48.1 C54.2 C55.1 C63_1.2 C63_2.2 C64_1.1 C64_2.1 R27.2 R36_1.2 R36_2.2 R56.2 U2.25 U4.5 U5.1 U6_1.1 U6_2.1 U7_1.1 U7_2.1 | length 2308.3
  Top Layer w6: R27.2@2240,3175 2195.27,3175 2190,3180.27 2190,3320 2202.5,3332.5 U4.5@2240,3332.5
  Top Layer w10: U7_1.1@3625,2608.23 v1(3625,2653.23) ; U7_2.1@3625,3435 v1(3625,3480)
  Top Layer w20: R56.2@3290,1788.96 v1(3290,1819.61) ; R36_1.2@3290,2615.73 v1(3290,2646.39) ; R36_2.2@3290,3442.5 v1(3290,3473.16)
  Bottom Layer w10: v1(3000,1701.46) 3000,1776.46 3010,1786.46 3256.84,1786.46 v1(3290,1819.61) ; v1(3000,2528.23) 3000,2603.23 3010,2613.23 3256.84,2613.23 v1(3290,2646.39) 3323.16,2613.23 3585,2613.23 v1(3625,2653.23) ; v1(3000,3355) 3000,3430 3010,3440 3256.84,3440 v1(3290,3473.16) 3323.16,3440 3585,3440 v1(3625,3480)
VUSB: C1.2 C2.2 C5.2 C6.2 C7.2 C8.2 C85.2 CON1.A4/B9 CON1.A9/B4 D1.5 D2.5 D3.4 D3.5 D3.6 T1.3 U1.26 U1.27 | length 551
  Top Layer w15: C2.2@4900,799.95 D1.5@4960,799.95 v1(4993.79,799.95) ; C1.2@4900,954.52 D2.5@4960,954.52 v1(4993.79,954.52)
  Bottom Layer w15: v1(4993.79,799.95) v1(4993.79,954.52) v1(4993.79,1083.74) ; v1(5320,955) 5320.28,954.72 C85.2@5399.5,954.72
WP: R59.2 U9.7 | length 256.9
  Top Layer w6: U9.7@1620,720 1620,670.27 1625.27,665 R59.2@1825,665
pads on no net: BH1.0 BH2.0 BH3.0 CON1.A8 CON1.B8 CON1.MH1 CON1.MH2 CON2_1.5 CON2_1.6 CON2_1.7 CON2_1.8 CON2_1.9 CON2_2.5 CON2_2.6 CON2_2.7 CON2_2.8 CON2_2.9 CON3.5 CON3.9 CON3.10 D5.x IC1_1.1 IC1_2.1 IC2_1.2 IC2_1.3 IC2_2.2 IC2_2.3 MECH2.0 MECH3.0 U1.2 U1.3 U1.5 U1.6 U1.7 U1.13 U1.18 U1.30 U1.31 U2.6 U2.7 U3.15 U3.21 U7_1.4 U7_2.4 U8.1 U8.2 U8.3 U8.4 U8.10 U8.11 U8.13 U8.14 U8.15 U8.16 U8.17 U8.18 U8.19 U8.20 U8.29 U8.30 U8.31 U8.32 U8.33

## Polygon pours and split planes (outlines as drawn)
GND on Top Layer "NONET_L-01_P-001" (solid, remove dead copper, pour order 157): 0,118.11 0,1771.65 295.28,1771.65 1358.27,1771.65 1358.27,3582.68 5511.81,3582.68 5511.81,118.11
GND on Top Layer "DIRECT" (solid, pour order 155): 300,2150 300,2100 240,2100 240,1670 150,1670 150,2150
NetR23_1 on Top Layer "DIRECT" (solid, pour order 154): 300,2210.24 300,2425 350,2475 535,2475 545,2485 545,2640 535,2650 257.88,2650 210,2602.12 210,2210.24
BP_GND on Top Layer "DIRECT" (solid, pour order 152): 365,3045 535,3045 545,3035 545,2785 535,2775 365,2775 355,2785 355,3035
+3V3 on Top Layer "DIRECT" (solid, pour order 151): 1520,3565 1375,3565 1375,3430 1520,3430
GND on Top Layer "DIRECT" (solid, pour order 150): 2050,3440 2050,3330 2099,3330 2117,3348 2157.5,3348 2157.5,3317 2121,3317 2103,3299 1755,3299 1755,3440 1815,3440
NetC49_2 on Top Layer "DIRECT" (solid, pour order 149): 2130,3570 2130,3450 1783,3450 1748,3485 1635,3485 1545,3485 1545,3570
NetC46_1 on Top Layer "DIRECT" (solid, pour order 148): 2060,3390 2155,3390 2185,3360 2265,3360 2265,3570 2180,3570 2180,3450 2155,3425 2060,3425
VSYS on Top Layer "DIRECT" (solid, pour order 146): 3726,526 3726,598 3722,602 3712,602 3712,555 3708,551 3606,551 3575,520 2790,520 2700,610 2700,1641.46 2997.51,1641.46 2997.51,1657.2 3080.26,1657.2 3085.51,1651.95 3124.24,1651.95 3124.24,1716.46 2700,1716.46 2700,2468.23 2997.51,2468.23 2997.51,2483.97 3080.26,2483.97 3085.51,2478.72 3124.24,2478.72 3124.24,2543.23 2700,2543.23 2700,3295 2997.51,3295 2997.51,3310.74 3080.26,3310.74 3085.51,3305.49 3124.24,3305.49 3124.24,3370 2355,3370 2332.5,3347.5 2222.5,3347.5 2222.5,3317.5 2332.5,3317.5 2355,3295 2565,3295 2565,515 2665,415 3696,415 3696,496
GND on Top Layer "DIRECt" (solid, pour order 120): 3265,1141.46 3400,1141.46 3475,1216.46 3780,1216.46 3780,1081.46 3265,1081.46
NetC62_1_1 on Top Layer "DIRECT" (solid, pour order 107): 3124.24,2472.04 3124.24,2457.04 3085.81,2457.04 3079,2450.23 3004,2450.23 3004,2457.04 3004,2472.04 3004,2478.23 3079.82,2478.23 3086,2472.04
VOUT_1 on Top Layer "DIRECT" (solid, pour order 109): 3265,2228.23 3340,2303.23 3780,2303.23 3780,2053.23 3470,2053.23 3395,1978.23 3265,1978.23
NetC62_1_1 on Top Layer "DIRECT" (solid, pour order 113): 2985,2373.23 3090,2373.23 3090,2053.23 3015,1978.23 2915,1978.23 2915,2303.23
GND on Top Layer "DIRECT" (solid, pour order 117): 2708,1908.23 3090,1908.23 3090,2038.23 3020,1968.23 2905,1968.23 2905,2309.15 2979.08,2383.23 3100,2383.23 3100,2343.23 3265,2343.23 3265,2243.23 3335,2313.23 3435,2313.23 3435,2378.23 3380,2378.23 3380,2393.23 3197.07,2393.23 3197.07,2538.23 3134.08,2538.23 3134.08,2450.37 3085.51,2450.37 3078.37,2443.23 2997.51,2443.23 2997.51,2458.23 2708,2458.23
GND on Top Layer "DIRECt" (solid, pour order 111): 3265,1968.23 3400,1968.23 3475,2043.23 3780,2043.23 3780,1908.23 3265,1908.23
+5VLOC_1 on Top Layer "DIRECT" (solid, pour order 143): 3610,2535.73 3610,2473.23 3585,2448.23 3585,2328.23 3840,2328.23 3840,2433.23 3847,2440.23 3979.72,2440.23 3979.72,2465.23 3848,2465.23 3840,2473.23 3840,2535.73
VBUS_1 on Top Layer "DIRECT" (solid, pour order 145): 4070.28,2440.23 4126,2440.23 4139,2453.23 4710,2453.23 4729.96,2433.27 4729.96,2208.19 4713,2191.23 4688,2191.23 4680,2183.23 4680,2063.23 4690,2053.23 5000,2053.23 5055,2108.23 5055,2183.23 5047,2191.23 4777,2191.23 4760,2208.23 4760,2448.23 4730,2478.23 4128,2478.23 4115,2465.23 4070.28,2465.23
VBUS_2 on Top Layer "DIRECT" (solid, pour order 144): 4070.28,3267 4126,3267 4139,3280 4710,3280 4729.96,3260.04 4729.96,3034.96 4713,3018 4688,3018 4680,3010 4680,2890 4690,2880 5000,2880 5055,2935 5055,3010 5047,3018 4777,3018 4760,3035 4760,3275 4730,3305 4128,3305 4115,3292 4070.28,3292
+5VLOC_2 on Top Layer "DIRECT" (solid, pour order 142): 3610,3362.5 3610,3300 3585,3275 3585,3155 3840,3155 3840,3260 3847,3267 3979.72,3267 3979.72,3292 3848,3292 3840,3300 3840,3362.5
GND on Top Layer "DIRECt" (solid, pour order 110): 3265,2795 3400,2795 3475,2870 3780,2870 3780,2735 3265,2735
GND on Top Layer "DIRECT" (solid, pour order 141): 4975,1141 5095,1141 5095,1275 4975,1275
GND on Top Layer "DIRECT" (solid, pour order 140): 5179.94,830.71 5104,754.76 5199,754.76 5249,804.76 5282,804.76 5282,830.71
GND on Top Layer "DIRECT" (solid, pour order 139): 5179.94,1059.06 5104,1135 5199,1135 5249,1085 5282,1085 5282,1059.06
VUSB on Top Layer "DIRECT" (solid, pour order 138): 5216,838.58 5283.58,838.58 5298,853 5328,853 5334.84,859.84 5334.84,887.84 5334.84,1031.16 5326.95,1039.05 5296.05,1039.05 5283.91,1051.18 5178.82,1051.18 5095.94,1134.05 4921.69,1134.06 4325,1134.06 4325,1110.43 4378.31,1110.43 4432.95,1055.79 4719.21,1055.79 4755,1020 4755,890 4705.35,890 4705.35,835 4810,835 4810,1022.37 4843.42,1055.79 4954.21,1055.79 4982.44,1027.56 5283.44,1027.56 5302,1009 5302,880 5284.2,862.2 5216,862.2
+5V on Top Layer "DIRECt" (solid, pour order 134): 3590,1635 3590,1500 4570,1500 4585,1515 4585,1635 4570,1650 3605,1650
SW2 on Top Layer "DIRECT" (solid, pour order 129): 3725,340 3725,200 3710,185 3515.79,185 3500,200.79 3500,340 3515,355 3710,355
SW2 on Top Layer "DIRECt" (solid, pour order 123): 3743,562.53 3743,677 3728,692 3702,692 3702,618 3710,610 3725,610 3732.91,602.09 3732.91,560.31 3740.79,560.31
SW1 on Top Layer "DIRECT" (solid, pour order 133): 3784.13,340 3784.13,200 3799.13,185 3993.35,185 4009.13,200.79 4009.13,340 3994.13,355 3799.13,355
PMID on Top Layer "DIRECT" (solid, pour order 128): 3814,496 3784,526 3784,598 3788,602 3798,602 3798,555 3802,551 3904,551 3935,520 4290,520 4290,415 3814,415
GND on Top Layer "DIRECT" (solid, pour order 125): 3703,415 3807,415 3807,493 3776,524 3776,553 3758.5,553 3758.5,678.5 3779,699 3794,699 3797.87,702.87 3797.87,745.87 3815,763 3815,785 3755,785 3755,765 3774.25,745.75 3774.25,705.25 3773,704 3730,704 3730,699 3750.63,678.37 3750.63,553 3733,553 3733,523 3703,493
SW1 on Top Layer "DIRECt" (solid, pour order 127): 3766.13,562.53 3766.13,677 3781.13,692 3807.13,692 3807.13,618 3799.13,610 3784.13,610 3776.22,602.09 3776.22,560.31 3768.35,560.31
NetBH1_2 on Top Layer "DIRECT" (solid, pour order 126): 2760,1065 3355,1065 3355,765 2760,765
VI/O on Top Layer "DIRECT" (solid, pour order 103): 4705.35,655.35 4670,620 3817.56,620 3817.56,595.75 3869.25,595.75 3935,530 5100,530 5100,620 4845,620 4810,655 4810,790 4705.35,790
VOUT on Top Layer "DIRECT" (solid, pour order 119): 3265,1401.46 3340,1476.46 3780,1476.46 3780,1226.46 3470,1226.46 3395,1151.46 3265,1151.46
NetC53_1 on Top Layer "DIRECT" (solid, pour order 118): 3124.24,1645.27 3124.24,1630.27 3085.81,1630.27 3079,1623.46 3004,1623.46 3004,1630.27 3004,1645.27 3004,1651.46 3079.82,1651.46 3086,1645.27
NetC53_1 on Top Layer "DIRECT" (solid, pour order 121): 2985,1546.46 3090,1546.46 3090,1226.46 3015,1151.46 2915,1151.46 2915,1476.46
GND on Top Layer "DIRECT" (solid, pour order 122): 2708,1081.46 3090,1081.46 3090,1211.46 3020,1141.46 2905,1141.46 2905,1482.37 2979.08,1556.46 3100,1556.46 3100,1516.46 3265,1516.46 3265,1416.46 3335,1486.46 3435,1486.46 3435,1551.46 3380,1551.46 3380,1566.46 3197.07,1566.46 3197.07,1711.46 3134.08,1711.46 3134.08,1623.6 3085.51,1623.6 3078.37,1616.46 2997.51,1616.46 2997.51,1631.46 2708,1631.46
GND on Top Layer "DIRECT" (solid, pour order 116): 2708,2735 3090,2735 3090,2865 3020,2795 2905,2795 2905,3135.92 2979.08,3210 3100,3210 3100,3170 3265,3170 3265,3070 3335,3140 3435,3140 3435,3205 3380,3205 3380,3220 3197.07,3220 3197.07,3365 3134.08,3365 3134.08,3277.14 3085.51,3277.14 3078.37,3270 2997.51,3270 2997.51,3285 2708,3285
NetC62_2_1 on Top Layer "DIRECT" (solid, pour order 112): 2985,3200 3090,3200 3090,2880 3015,2805 2915,2805 2915,3130
VOUT_2 on Top Layer "DIRECT" (solid, pour order 108): 3265,3055 3340,3130 3780,3130 3780,2880 3470,2880 3395,2805 3265,2805
NetC62_2_1 on Top Layer "DIRECT" (solid, pour order 106): 3124.24,3298.82 3124.24,3283.82 3085.81,3283.82 3079,3277 3004,3277 3004,3283.82 3004,3298.82 3004,3305 3079.82,3305 3086,3298.82
CHRG_BAT on Top Layer "DIRECT" (solid, pour order 104): 2975,620 2975,725.79 3065,725.79 3065,645 3090,620 3270,620 3691.57,620 3691.57,595.75 3635.75,595.75 3570,530 3015,530 2975,570
+5V on Top Layer "DIRECT" (solid, pour order 102): 4325,1141.93 4570,1141.93 4570,1225 4436.26,1225 4376.81,1165.55 4325,1165.55
GND on Mid Layer 1 "NONET_L-01_P-001" (solid, pour order 158): 0,118.11 0,1771.65 295.28,1771.65 1358.27,1771.65 1358.27,3582.68 5511.81,3582.68 5511.81,118.11
BP_GND on Mid Layer 1 "NONET_L-01_P-001" (solid, pour order 147): 0,3582.68 1338.58,3582.68 1338.58,1791.34 314.96,1791.34 0,1791.34
GND on Bottom Layer "NONET_L-01_P-001" (solid, pour order 159): 0,0 0,1771.65 295.28,1771.65 1358.27,1771.65 1358.27,3700.79 5511.81,3700.79 5511.81,0
BP_GND on Bottom Layer "NONET_L-01_P-001" (solid, pour order 153): 546.85,2940 546.85,2955 546.85,2995 546.85,3050 536.85,3060 521.85,3060 491.85,3090 401.85,3090 376.85,3065 361.85,3065 351.85,3055 351.85,2990 351.85,2960 351.85,2940 361.85,2930 536.85,2930
NetC62_1_1 on Bottom Layer "NONET_L-01_P-001" (solid, pour order 115): 3057,2518.23 3039,2518.23 3024,2503.23 2995,2503.23 2995,2313.23 3101,2313.23 3101,2503.23 3072,2503.23
+5V on Bottom Layer "NONET_L-01_P-001" (solid, pour order 137): 4390,1155 4405,1140 4570,1140 4585,1155 4585,1595 4570,1610 4400,1610 4390,1600
NetBH1_2 on Bottom Layer "NONET_L-01_P-001" (solid, pour order 135): 3125,1035 3125,1020 3115,1010 3115,990 3125,980 3125,925 3135,915 3150,915 3180,885 3270,885 3295,910 3310,910 3320,920 3320,985 3330,995 3330,1005 3320,1015 3320,1035 3310,1045 3135,1045
SW2 on Bottom Layer "NONET_L-01_P-001" (solid, pour order 130): 3545,740 3680,740 3750,670 3750,585 3705,540 3641,540 3613,512 3613,185 3500,185 3500,695
SW1 on Bottom Layer "NONET_L-01_P-001" (solid, pour order 132): 3964.13,740 3829.13,740 3759.13,670 3759.13,585 3804.13,540 3868.13,540 3896.13,512 3896.13,185 4009.13,185 4009.13,695
GND on Bottom Layer "NONET_L-01_P-001" (solid, pour order 131): 3735,560 3708,533 3643,533 3620,510 3620,150 3649,150 3649,510 3695,510 3860,510 3860,485 3860,150 3890,150 3890,505 3862,533 3802,533 3775,560
NetC53_1 on Bottom Layer "NONET_L-01_P-001" (solid, pour order 124): 3057,1691.46 3039,1691.46 3024,1676.46 2995,1676.46 2995,1486.46 3101,1486.46 3101,1676.46 3072,1676.46
NetC62_2_1 on Bottom Layer "NONET_L-01_P-001" (solid, pour order 114): 3057,3345 3039,3345 3024,3330 2995,3330 2995,3140 3101,3140 3101,3330 3072,3330
+3V3 on Mid Layer 2 "NONET_L-01_P-001" (solid, pour order 105): 0,118.11 0,1771.65 295.28,1771.65 1358.27,1771.65 1358.27,3582.68 5511.81,3582.68 5511.81,118.11

## Keep-outs
Keep-Out Layer:
  the board outline again, w10

## Other copper
Top Layer:
  pour cut-out: 2130,3576 2130,3450 2180,3450 2180,3576
  pour cut-out: 2701,3294.5 2701,3285.5 2977,3285.5 2977,3294.5
  pour cut-out: 2701,2467.5 2701,2458.5 2977,2458.5 2977,2467.5
  pour cut-out: 2700,1641 2700,1632 2976,1632 2976,1641
  pour cut-out: 3740,763.82 3739.13,710.62 3774.25,710.62 3774.25,745.75 3756.18,763.82
  pour cut-out: 4144,1205 4144,1123 4201,1123 4201,1205
  pour cut-out: 4705.35,835 4705.35,790 4816,790 4816,835
  pour cut-out: 3730,405 3730,135 3780,135 3780,405
  pour cut-out: 3100,1506.46 3100,1081.46 3255,1081.46 3255,1506.46
  pour cut-out: 3100,2333.23 3100,1908.23 3255,1908.23 3255,2333.23
  pour cut-out: 3100,3160 3100,2735 3255,2735 3255,3160
  text "OpenPack" at 188.39,293.19 h30
  text "BATMOD_V1p0" at 188.39,223.19 h30
  text "FP / 26" at 188,155 h30

## Silkscreen, mask and mechanical layers (free items; w line width, h text height)
Top Overlay:
  circle w10: c4133.86,793.31 r118.11
  circle w10: c2480.31,2907.48 r118.11
  circle w10: c826.77,2907.48 r118.11
  circle w10: c2480.31,793.31 r118.11
  circle w10: c4133.86,2907.48 r118.11
  circle w10: c826.77,793.31 r118.11
  text "USB2" at 4882,3468.12 h60
  text "BATMOD" at 95,3300 h200
  text "V1p0" at 70,3136.66 h80
  text "USB1" at 4882,2641.35 h60
  text "SWD" at 152,1502 h60
  text "STAT" at 5057,1338.12 h60
  text "SDA" at 1932,943.55 h60
  text "SCL" at 1932,843.55 h60
  text "GND" at 1932,743.55 h60
  text "GND" at 1932,643.55 h60
  text "WP" at 1854.99,512 h60 r90
Top Solder:
  text "OpenPack" at 188.39,293.19 h30
  text "BATMOD_V1p0" at 188.39,223.19 h30
  text "FP / 26" at 188,155 h30